# Altium PCB System Control.PcbDoc (part 6 of 7)
Units mil, origin at the board's own origin, x right, y up, seen from the top; angles counter-clockwise.
Board outline 5312.56 x 5103.22 mil, 12 copper layers (Top, GND 2, Signal 3, Signal 4, 3.3V 5, Signal 6, Signal 7, 2.5V 8, Signal 9, Signal 10, GND 11, Bottom); 503 components, 484 nets, 2219 pads, 1158 vias.
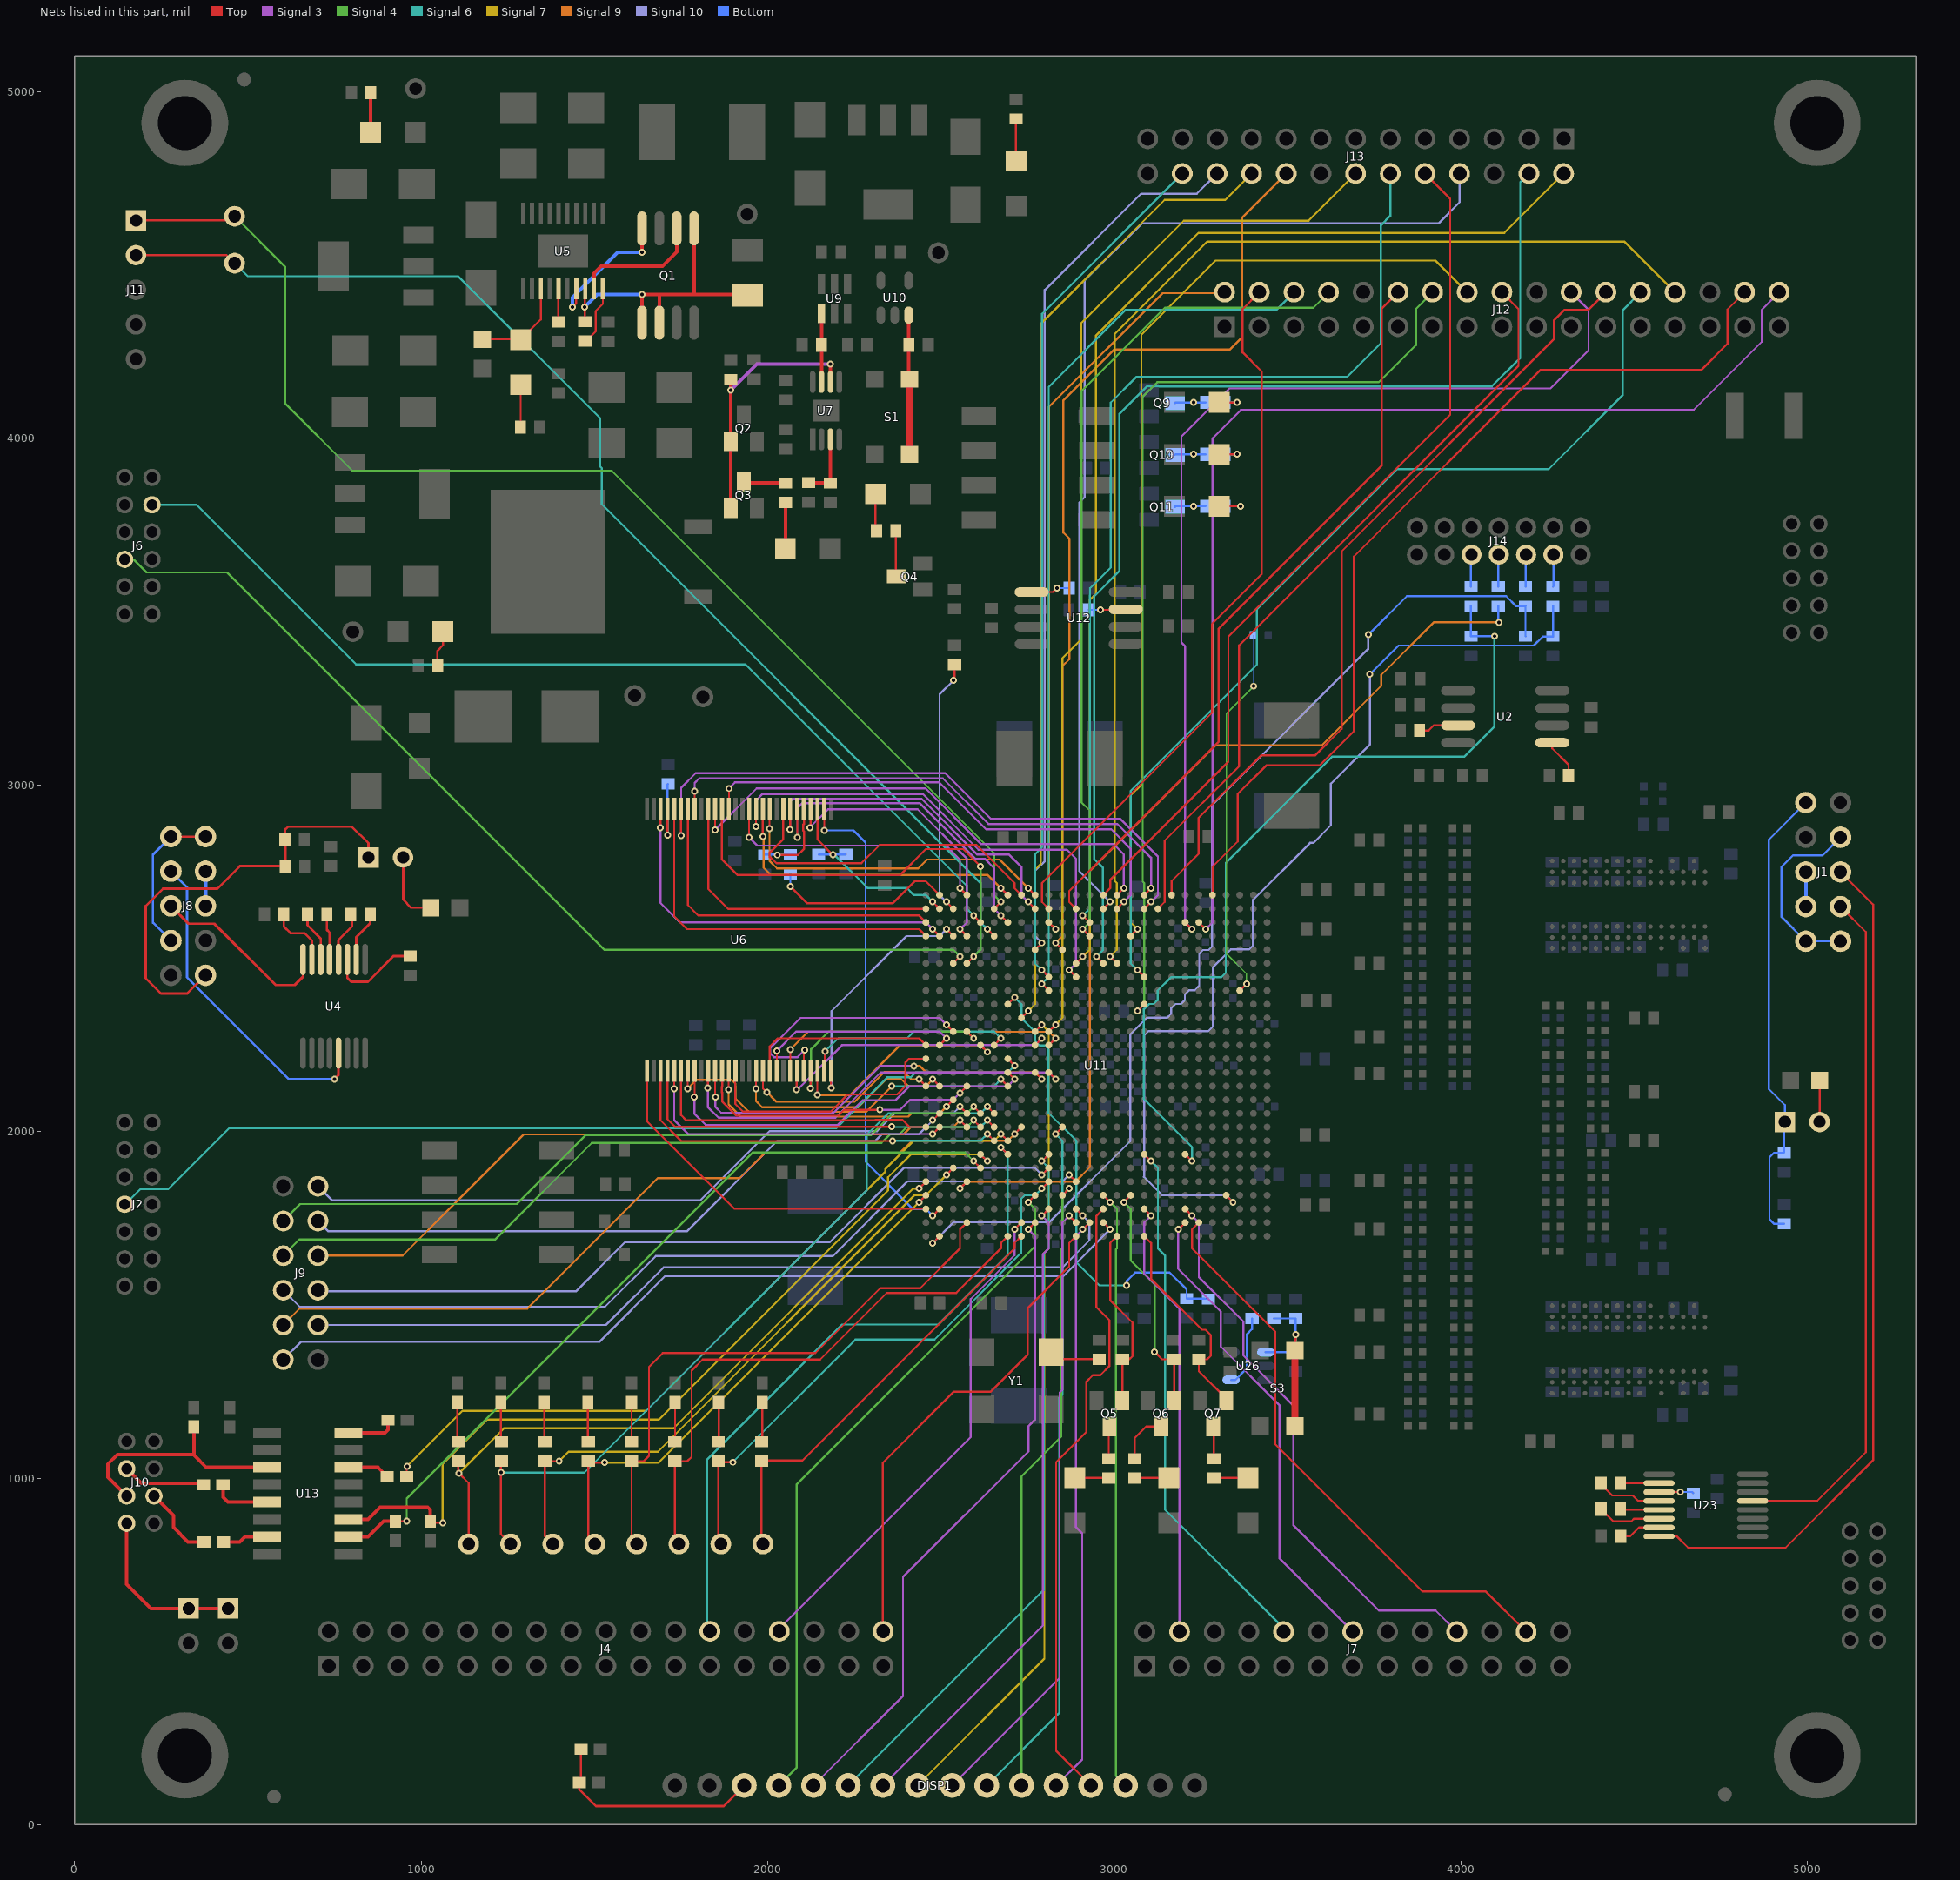
[diagram p16: the nets of this part, all layers, seen from the top]

## Via types
v1: diameter 20, hole 10, Top to Bottom, tented top, 1040 vias
v2: diameter 20, hole 8, Top to Bottom, tented top, 118 vias

## Nets (pads, with @x,y where several pads share a name; then routed paths per layer and width w, separated by ;. In a path a pad name is that pad's centre, name@x,y a point inside that pad or via, vN(x,y) a via of type N, cw(c..) or ccw(c..) an arc to the next point about the centre after c; other vN are vias at no path point) (continued)
INA2_5: J4.24 U11.G20 | length 1958.8
  Top w5.91: v1(2672.78,1953.94) U11.G20@2692.47,1934.25
  Signal 6 w5.91: J4.24@1833,558 1830,558 1825.07,562.93 1825.07,1054.07 2214.17,1443.17 2491.55,1443.17 2692.47,1644.08 2692.47,1934.25 v1(2672.78,1953.94)
INA2_6: J4.28 U11.B19 | length 1468.9
  Top w5.91: v1(2712.15,1717.71) U11.B19@2731.84,1737.4
  Signal 3 w5.91: J4.28@2033,558 2033,566 2585.14,1118.14 2585.14,1516.49 2712,1643.35 2712,1717.56 v1(2712.15,1717.71)
INA2_7: J4.34 U11.A15 | length 1433.4
  Top w5.91: J4.34@2333,558 2332,559 2332,1045 2536,1249 2642,1249 2750,1357 2750,1491 2869.63,1610.63 2869.63,1678.34 U11.A15@2889.32,1698.03
INA2_8: J7.4 U11.C10 | length 1278.3
  Top w5.91: U11.C10@3086.17,1776.77 v1(3105.86,1757.08)
  Signal 3 w5.91: v1(3105.86,1757.08) 3086.17,1737.4 3086.17,1589.83 3188,1488 J7.4@3188,557
INA2_9: J7.10 U11.G10 | length 1543.7
  Top w5.91: U11.G10@3086.17,1934.25 v1(3105.86,1914.56)
  Signal 6 w5.91: v1(3105.86,1914.56) 3125.54,1894.88 3125.54,1663.19 3146,1642.73 3146,909 3488,567 J7.10@3488,557
INA2_10: J7.14 U11.B7 | length 1397.6
  Top w5.91: v1(3184.59,1717.71) U11.B7@3204.28,1737.4
  Signal 3 w5.91: v1(3184.59,1717.71) 3184,1717.12 3184,1604 3307,1481 3307,1380 3476,1211 3476,769 J7.14@3688,557
INA2_11: J7.20 U11.C7 | length 1640.5
  Top w5.91: U11.C7@3204.28,1776.77 v1(3223.97,1757.08)
  Signal 3 w5.91: v1(3223.97,1757.08) 3243.65,1737.4 3243.65,1580.35 3372,1452 3372,1354 3516,1210 3516,865 3763,618 3927,618 J7.20@3988,557
INA2_12: J7.24 U11.B6 | length 1695.1
  Top w5.91: U11.B6@3243.65,1737.4 3223.96,1717.71 3223.96,1663.19 3464.56,1422.6 3464.56,1097.44 3889,673 4072,673 J7.24@4188,557
INB1_1: J12.2 U11.AD17 | length 2187.1
  Top w5.91: U11.AD17@2810.58,2603.54 v1(2830.27,2583.86)
  Signal 9 w5.91: v1(2830.27,2583.86) 2811,2603.12 2811,4091 3139,4419 3315,4419 J12.2@3318,4422
INB1_2: J12.6 U11.W17 | length 2578.5
  Top w5.91: v1(2790.89,2426.38) U11.W17@2810.58,2406.69
  Signal 6 w5.91: v1(2790.89,2426.38) 2810.58,2446.06 2810.58,4148.58 3033,4371 3468,4371 J12.6@3518,4421
INB1_3: J12.12 U11.AE15 | length 2179.1
  Top w5.91: U11.AE15@2889.32,2642.91 2869.63,2662.6 2869.63,2693.63 3301,3125 3301,3451 3771,3921 3771,4374 J12.12@3818,4421
INB1_4: J12.16 U11.AC11 | length 2830.6
  Top w5.91: U11.AC11@3046.8,2564.17 v1(3066.49,2583.86)
  Signal 7 w5.91: v1(3066.49,2583.86) 3047,2603.34 3047,2970 3078,3001 3078,4299 3292,4513 3926,4513 J12.16@4018,4421
INB1_5: J12.22 U11.AD7 | length 2927.3
  Top w5.91: U11.AD7@3204.28,2603.54 v1(3223.97,2583.86)
  Signal 3 w5.91: v1(3223.97,2583.86) 3204.28,2603.54 3204.28,3399.99 3193.49,3410.77 3193.49,4005.49 3332,4144 4258,4144 4368,4254 4368,4371 J12.22@4318,4421
INB1_6: J12.26 U11.Y10 | length 2856.5
  Top w5.91: v1(3066.48,2465.75) U11.Y10@3086.17,2446.06
  Signal 6 w5.91: v1(3066.48,2465.75) 3047,2485.23 3047,2983 3411,3347 3411,3506 3816,3911 4253,3911 4467,4125 4467,4370 J12.26@4518,4421
INB1_7: J12.32 U11.AF5 | length 2736.5
  Top w5.91: U11.AF5@3283.02,2682.28 3283.02,2764.02 3356,2837 3356,2974 3439,3057 3593,3057 3691,3155 3691,3659 4229,4197 4693,4197 4769,4273 4769,4372 J12.32@4818,4421
INB1_8: J13.2 U11.AA15 | length 3377.9
  Top w5.91: U11.AA15@2889.32,2485.43 v1(2909.01,2505.12)
  Signal 7 w5.91: v1(2909.01,2505.12) 2929,2525.11 2929,3534 2947,3552 2947,4297 3243,4593 4125,4593 J13.2@4296,4764
INB1_9: J13.8 U11.AE13 | length 3121.8
  Top w5.91: U11.AE13@2968.06,2642.91 v1(2987.75,2662.6)
  Signal 10 w5.91: v1(2987.75,2662.6) 2899,2751.34 2899,3815 2914,3830 2914,4455 3079,4620 3935,4620 3996,4681 J13.8@3996,4764
INB1_10: J13.12 U11.AD14 | length 2892.2
  Top w5.91: v1(2909,2623.23) U11.AD14@2928.69,2603.54
  Signal 6 w5.91: v1(2909,2623.23) 2929,2643.23 2929,3567 2989.19,3627.19 2989.19,4103.19 3063,4177 3671,4177 3769,4275 3769,4615 3796,4642 J13.12@3796,4764
INB1_11: J13.18 U11.AB16 | length 2732.8
  Top w5.91: v1(2830.26,2544.49) U11.AB16@2849.95,2524.8
  Signal 9 w5.91: v1(2830.26,2544.49) 2850,2564.23 2850,3343 2870,3363 2870,3711 2853,3728 2853,4110 2999,4256 3333,4256 3369,4292 3369,4637 J13.18@3496,4764
INB1_12: J13.22 U11.AB18 | length 2567.2
  Top w5.91: U11.AB18@2771.21,2524.8 v1(2790.9,2544.49)
  Signal 10 w5.91: v1(2790.9,2544.49) 2771.21,2564.17 2771.21,2752.21 2799,2780 2799,4428 3077,4706 3238,4706 J13.22@3296,4764
INB2_1: J12.4 U11.AE17 | length 2091.6
  Top w5.91: U11.AE17@2810.58,2642.91 2790.89,2662.6 2790.89,2717.12 3282,3208.23 3282,3465 3425,3608 3425,4193 3370,4248 3370,4373 J12.4@3418,4421
INB2_2: J12.8 U11.AC14 | length 2429.3
  Top w5.91: v1(2909,2583.86) U11.AC14@2928.69,2564.17
  Signal 4 w5.91: v1(2909,2583.86) 2929,2603.86 2929,2926 2905,2950 2905,4136 3146,4377 3574,4377 J12.8@3618,4421
INB2_3: J12.14 U11.V10 | length 2831.9
  Top w5.91: v1(3066.48,2347.64) U11.V10@3086.17,2367.32
  Signal 4 w5.91: v1(3066.48,2347.64) 3086.17,2367.32 3086.17,2717.12 3081.79,2721.5 3081.79,4119.79 3124,4162 3763,4162 3870,4269 3870,4373 J12.14@3918,4421
INB2_4: J12.18 U11.AE9 | length 2228.9
  Top w5.91: U11.AE9@3125.54,2642.91 3145.03,2662.4 3145.03,2839.24 3360,3054.21 3360,3403 4166,4209 4166,4373 J12.18@4118,4421
INB2_5: J12.24 U11.AF8 | length 2389.6
  Top w5.91: U11.AF8@3164.91,2682.28 3164.91,2722.91 3243,2801 3243,2905 3423,3085 3579,3085 3656,3162 3656,3674 4268,4286 4268,4340 4299,4371 4368,4371 J12.24@4418,4421
INB2_6: J12.28 U11.AA12 | length 3623
  Top w5.91: v1(2987.74,2505.12) U11.AA12@3007.43,2485.43
  Signal 7 w5.91: v1(2987.74,2505.12) 3007,2524.38 3007,2717 3000.58,2723.42 3000.58,4300.58 3268,4568 4471,4568 J12.28@4618,4421
INB2_7: J12.34 U11.AD6 | length 3315.4
  Top w5.91: U11.AD6@3243.65,2603.54 v1(3263.34,2583.86)
  Signal 3 w5.91: v1(3263.34,2583.86) 3283.02,2603.54 3283.02,4000.02 3365,4082 4671,4082 4868,4279 4868,4371 J12.34@4918,4421
INB2_8: J13.4 U11.AA13 | length 3407.4
  Top w5.91: v1(2948.37,2505.12) U11.AA13@2968.06,2485.43
  Signal 6 w5.91: v1(2948.37,2505.12) 2967.04,2523.78 2967.04,2760.96 2941.52,2786.48 2941.52,3544.35 3014,3616.82 3014,4069.8 3094.2,4150 4089,4150 4171,4232 4171,4739 J13.4@4196,4764
INB2_9: J13.10 U11.AF13 | length 2526.6
  Top w5.91: U11.AF13@2968.06,2682.28 2987.75,2701.97 2987.75,2725.75 3329,3067 3329,3428 3969,4068 3969,4691 J13.10@3896,4764
INB2_10: J13.14 U11.T17 | length 3053.1
  Top w5.91: U11.T17@2810.58,2288.58 v1(2830.27,2308.27)
  Signal 7 w5.91: v1(2830.27,2308.27) 2849.95,2327.95 2849.95,3365.56 2904.04,3419.65 2904.04,4332.04 3200,4628 3560,4628 J13.14@3696,4764
INB2_11: J13.20 U11.U19 | length 2813.7
  Top w5.91: U11.U19@2731.84,2327.95 v1(2751.53,2347.64)
  Signal 7 w5.91: v1(2751.53,2347.64) 2771.21,2367.32 2771.21,2755.21 2787,2771 2787,4330 3145,4688 3320,4688 J13.20@3396,4764
INB2_12: J13.24 U11.Y17 | length 2510.2
  Top w5.91: v1(2790.89,2465.75) U11.Y17@2810.58,2446.06
  Signal 6 w5.91: v1(2790.89,2465.75) 2771.21,2485.43 2771.21,2800.21 2791,2820 2791,4359 J13.24@3196,4764
IO1: J9.2 U11.B13 | length 2569.2
  Top w5.91: U11.B13@2968.06,1737.4 v1(2987.74,1717.71)
  Signal 10 w5.91: J9.2@602,1342 653,1393 1514,1393 1704,1583 2853.03,1583 v1(2987.74,1717.71)
IO2: J9.3 U11.C15 | length 2433.9
  Top w5.91: U11.C15@2889.32,1776.77 v1(2909,1757.08)
  Signal 10 w5.91: J9.3@702,1442 1533,1442 1699,1608 2850,1608 2928,1686 2928,1738.09 v1(2909,1757.08)
IO3: J9.4 U11.J19 | length 2366.4
  Top w5.91: v1(2712.15,1993.3) U11.J19@2731.84,2012.99
  Signal 9 w5.91: J9.4@602,1442 649,1489 1306,1489 1682.66,1865.66 1918.66,1865.66 1991,1938 2380,1938 2415.62,1973.62 2692.47,1973.62 v1(2712.15,1993.3)
IO4: J9.5 U11.F17 | length 2273.6
  Top w5.91: v1(2790.89,1875.19) U11.F17@2810.58,1894.88
  Signal 10 w5.91: J9.5@702,1542 705,1539 1446,1539 1588,1681 2179,1681 2393,1895 2771.09,1895 v1(2790.89,1875.19)
IO5: J9.6 U11.E15 | length 2473.3
  Top w5.91: v1(2869.63,1875.2) U11.E15@2889.32,1855.51
  Signal 10 w5.91: J9.6@602,1542 650,1494 1530,1494 1677,1641 2188,1641 2403,1856 2850,1856 2869.2,1875.2 v1(2869.63,1875.2)
IO6: J9.7 U11.J23 | length 2042.3
  Top w5.91: v1(2554.67,2032.68) U11.J23@2574.36,2012.99
  Signal 9 w5.91: J9.7@702,1642 946,1642 1091,1787 1295.66,1991.66 2391.66,1991.66 2413,2013 2535,2013 v1(2554.67,2032.68)
IO7: J9.8 U11.J22 | length 2181.7
  Top w5.91: v1(2594.04,2032.68) U11.J22@2613.73,2012.99
  Signal 4 w5.91: J9.8@602,1642 649,1689 1214,1689 1492,1967 2327.61,1967 2352.27,1991.66 2379.66,1991.66 2400.99,2012.99 2574.36,2012.99 v1(2594.04,2032.68)
IO8: J9.9 U11.K25 | length 1947
  Top w5.91: v1(2475.93,2032.67) U11.K25@2495.62,2052.36
  Signal 10 w5.91: J9.9@702,1742 732,1712 1766,1712 2027,1973 2310,1973 2329,1992 2435.26,1992 v1(2475.93,2032.67)
IO9: J9.10 U11.K22 | length 2156.6
  Top w5.91: v1(2594.04,2072.05) U11.K22@2613.73,2052.36
  Signal 4 w5.91: J9.10@602,1742 651,1791 1276,1791 1474,1989 2297,1989 2360.36,2052.36 2574.36,2052.36 v1(2594.04,2072.05)
IO10: J9.11 U11.K23 | length 2008.9
  Top w5.91: v1(2554.67,2072.05) U11.K23@2574.36,2052.36
  Signal 10 w5.91: J9.11@702,1842 742,1802 1806,1802 2005,2001 2315,2001 2366.36,2052.36 2534.99,2052.36 v1(2554.67,2072.05)
IO/RXD: J10.6 R73.1 U13.3 | length 681.5
  Top w10: J10.6@150.26,948.52 96,1002.78 96,1041 123,1068 343,1068 344,1067 ; R73.1@344,1148 344,1067 ; U13.3@555,1031 380,1031 344,1067
IO/RXD_FPGA: R98.1 U11.H20 | length 2173.6
  Top w5.91: R98.1@958,1004 958,1033 v1(959,1034) ; v1(2672.78,1993.31) U11.H20@2692.47,1973.62
  Signal 7 w5.91: v1(959,1034) 1119,1194 1648.88,1194 2339,1884.12 2339,1891.22 2421.41,1973.62 2653.1,1973.62 v1(2672.78,1993.31)
IO/TXD: J10.5 R116.2 | length 220.1
  Top w10: J10.5@229,948.52 285,892.52 285,858 327,816 R116.2@374,816
IO/TXD_FPGA: R100.1 U11.F22 U13.10 | length 2340.1
  Top w5.91: R100.1@925.7,876.31 926,876 v1(958,876) ; v1(2594.04,1914.57) U11.F22@2613.73,1894.88
  Top w10: U13.10@790,831 846,831 891.31,876.31 R100.1@925.7,876.31
  Signal 4 w5.91: v1(958,876) 958,941 1957,1940 2568.61,1940 v1(2594.04,1914.57)
JTAG_TCK: R166.1 R167.1 U11.A25 | length 3126.4
  Top w5.91: v1(2475.93,1678.34) U11.A25@2495.62,1698.03
  Signal 10 w5.91: v1(2475.93,1678.34) 2535.59,1738 2812,1738 3046,1972 3046,2280 3094.98,2328.98 3152.96,2328.98 3163.89,2339.91 3163.89,2355.89 3176.35,2368.35 3192.33,2368.35 3203.26,2379.28 3203.26,2395.26 3215.72,2407.72 3231.7,2407.72 3244.67,2420.7 3244.67,2512.85 3255.61,2523.78 3271.78,2523.78 3282,2534 3282,2942 3732,3392 3732,3433 v1(3733,3434)
  Bottom w5.91: v1(3733,3434) 3843.86,3544.86 4130.14,3544.86 4159.8,3515.2 R166.1@4185.9,3515.2 ; R167.1@4186.39,3429.07 4185.9,3429.55 4185.9,3469.33 R166.1@4185.9,3515.2 ; R166.1@4186.39,3515.68 R166.1@4185.9,3515.2
JTAG_TDI: R157.1 R158.1 U11.G7 | length 2490.9
  Top w5.91: U11.G7@3204.28,1934.25 v1(3223.97,1914.56)
  Signal 7 w5.91: v1@4095.82,3428.53 v1(4096.6,3429.31)
  Signal 6 w5.91: v1(3223.97,1914.56) 3223.97,1955.03 3085.15,2093.85 3085.15,2353.32 3100.17,2368.35 3113.58,2368.35 3124.52,2379.28 3124.52,2406.52 3163.04,2445.04 3308.39,2445.04 3321.37,2458.02 3321.37,2774.58 3628.79,3082 4010,3082 4096.6,3168.6 v1(4096.6,3429.31)
  Bottom w5.91: R157.1@4028.91,3515.68 R158.1@4028.91,3429.07 4029.15,3429.31 v1(4096.6,3429.31)
JTAG_TDO: R160.1 U11.E23 | length 2825.5
  Top w5.91: v1(2554.67,1835.82) U11.E23@2574.36,1855.51
  Signal 9 w5.91: v1(2554.67,1835.82) 2573.85,1855 2887,1855 2929,1897 2929,2751 3292,3114 3598,3114 3770,3286 3770,3317.82 3921.34,3469.16 v1(4109.59,3469.16)
  Bottom w5.91: R160.1@4107.65,3515.68 4107.65,3471.1 v1(4109.59,3469.16)
JTAG_TMS: R171.1 R172.1 U11.D4 | length 3181.5
  Top w5.91: U11.D4@3322.39,1816.14 v1(3342.08,1796.45)
  Signal 10 w5.91: v1(3342.08,1796.45) 3321.53,1817 3137.66,1817 3085,1869.66 3086,1870.66 3086,2277 3098.61,2289.61 3271.07,2289.61 3283.85,2302.39 3283.85,2473.56 3336.11,2525.82 3389.17,2525.82 3400.11,2536.76 3400.11,2668.56 3564.46,2832.91 3574.21,2832.91 3624.51,2883.21 3624.51,3003.51 3737,3116 v1(3737,3319)
  Bottom w5.91: v1(3737,3319) 3820.24,3402.24 4210.24,3402.24 4236.18,3428.18 4266.43,3428.18 R172.1@4265.54,3429.07 ; R172.1@4265.54,3429.07 R171.1@4265.54,3515.68 ; R172.1@4265.54,3429.07 R171.1@4265.54,3515.68 ; R172.1@4265.54,3429.07 R171.1@4265.54,3515.68 ; R172.1@4265.54,3429.07 R171.1@4265.54,3515.68 ; R172.1@4265.54,3429.07 R171.1@4265.54,3515.68
LCD_D1: DISP1.7 U11.C17 | length 1878
  Top w5.91: v1(2790.89,1757.08) U11.C17@2810.58,1776.77
  Signal 3 w5.91: DISP1.7@2332.01,113.33 2794,575.33 2794,1646.61 2810.58,1663.19 2810.58,1737.4 v1(2790.89,1757.08)
LCD_D2: DISP1.8 U11.T18 | length 2387.7
  Top w5.91: U11.T18@2771.21,2288.58 v1(2790.9,2308.27)
  Signal 7 w5.91: DISP1.8@2432.01,113.33 2798,479.33 2798,1650.61 2810.58,1663.19 2810.58,2288.58 v1(2790.9,2308.27)
LCD_D3: DISP1.9 U11.B15 | length 1811.4
  Top w5.91: v1(2869.63,1757.09) U11.B15@2889.32,1737.4
  Signal 3 w5.91: DISP1.9@2532.01,113.33 2842,423.33 2842,1247 2849.95,1254.95 2849.95,1737.4 v1(2869.63,1757.09)
LCD_D4: DISP1.10 U11.J16 | length 2006.2
  Top w5.91: v1(2830.26,1993.3) U11.J16@2849.95,2012.99
  Signal 6 w5.91: DISP1.10@2632.01,113.33 2841,322.33 2841,1231 2849.95,1239.95 2849.95,1973.62 v1(2830.26,1993.3)
LCD_D5: DISP1.11 U11.D16 | length 1807.3
  Top w5.91: U11.D16@2849.95,1816.14 v1(2869.64,1835.83)
  Signal 4 w5.91: DISP1.11@2732.01,113.33 2732.01,1005.01 2847.04,1120.04 2847.04,1660.28 2849.95,1663.19 2849.95,1816.14 v1(2869.64,1835.83)
LCD_D6: DISP1.12 U11.B14 | length 1678.8
  Top w5.91: v1(2909,1717.71) U11.B14@2928.69,1737.4
  Signal 3 w5.91: DISP1.12@2832.01,113.33 2907,188.33 2907,841 2889.32,858.68 2889.32,1698.03 v1(2909,1717.71)
LCD_D7: DISP1.13 U11.C13 | length 1804.7
  Top w5.91: DISP1.13@2932.01,113.33 2832,213.34 2832,1046 2918.53,1132.53 2918.53,1277.53 2938,1297 2959.07,1297 2986,1323.93 2986,1455 2948.37,1492.63 2948.37,1757.08 U11.C13@2968.06,1776.77
LCD_D8: DISP1.14 U11.D13 | length 1731.7
  Top w5.91: U11.D13@2968.06,1816.14 v1(2987.75,1796.45)
  Signal 4 w5.91: v1(2987.75,1796.45) 3007.43,1776.77 3007.43,1663.19 3004.52,1660.27 3004.52,140.83 DISP1.14@3032.01,113.33
LCD_EN: DISP1.6 U11.G17 | length 2076.9
  Top w5.91: v1(2790.89,1914.56) U11.G17@2810.58,1934.25
  Signal 6 w5.91: DISP1.6@2232.01,113.33 2796,677.33 2796,1648.61 2810.58,1663.19 2810.58,1894.88 v1(2790.89,1914.56)
LCD_R/~W: DISP1.5 U11.B18 | length 1905.1
  Top w5.91: v1(2751.52,1717.71) U11.B18@2771.21,1737.4
  Signal 3 w5.91: DISP1.5@2132.01,113.33 2390,371.33 2390,715 2752.55,1077.55 2752.55,1150.64 2771.21,1169.31 2771.21,1698.03 v1(2751.52,1717.71)
LCD_RS: DISP1.4 U11.D18 | length 2025.3
  Top w5.91: v1(2751.52,1796.45) U11.D18@2771.21,1816.14
  Signal 4 w5.91: DISP1.4@2032.01,113.33 2083,164.33 2083,981.1 2771.21,1669.31 2771.21,1776.77 v1(2751.52,1796.45)
LED0: Q7.1 R40.2 U11.A10 | length 620.4
  Top w5.91: U11.A10@3086.17,1698.03 3105.86,1678.34 3105.86,1575.14 3242.95,1438.05 3252.93,1428.07 3263.04,1428.07 3277.87,1413.24 3277.87,1353.26 3267.43,1342.82 R40.2@3243.65,1342.82 3243.65,1308.27 3322.39,1229.53 Q7.1@3322.39,1223.72
LED1: Q6.1 R41.2 U11.D11 | length 681.4
  Top w5.91: v1(3027.11,1796.45) U11.D11@3046.8,1816.14 ; v1@3116.39,1363.89 3137.47,1342.82 R41.2@3172.78,1342.82 Q6.1@3172.78,1223.72
  Signal 4 w5.91: v1(3027.11,1796.45) 3046.8,1776.77 3046.8,1628.2 3116,1559 v1(3116,1364)
LED2: Q5.1 R37.2 U11.A12 | length 532.6
  Top w5.91: U11.A12@3007.43,1698.03 2987.74,1678.34 2987.74,1513.26 3052,1449 3052,1352 3042.82,1342.82 R37.2@3023.18,1342.82 Q5.1@3023.18,1223.72
LED3: LD0.1 TP9.1 U11.A19 | length 1268.4
  Top w5.91: TP9.1@1986,810 1982,814 LD0.1@1982,1049 1984,1051 2100.22,1051 2712.15,1662.93 2712.15,1678.34 U11.A19@2731.84,1698.03
LED4: LD1.1 TP10.1 U11.E17 | length 1623.7
  Top w5.91: TP10.1@1864.71,810 1857,817.71 LD1.1@1857,1049 1860,1046 v1(1899,1046) ; v1(2790.89,1835.82) U11.E17@2810.58,1855.51
  Signal 6 w5.91: v1(1899,1046) 2253,1400 2481,1400 2731,1650 2731,1806 2741,1816 2771.07,1816 v1(2790.89,1835.82)
LED5: LD2.1 TP11.1 U11.A20 | length 1627.8
  Top w5.91: TP11.1@1743.43,810 1732,821.43 LD2.1@1732,1049 1768,1049 1780,1061 1780,1310 1812,1342 2151,1342 2343,1534 2543.59,1534 2672.78,1663.19 2672.78,1678.34 U11.A20@2692.47,1698.03
LED6: LD3.1 TP12.1 U11.B23 | length 1680.3
  Top w5.91: TP12.1@1622.14,810 1607,825.14 LD3.1@1607,1049 1642,1049 1657,1064 1657,1321 1697,1361 2137,1361 2324,1548 2439.48,1548 2554.67,1663.19 2554.67,1717.71 U11.B23@2574.36,1737.4
LED7: LD4.1 TP13.1 U11.D26 | length 1542.1
  Top w5.91: TP13.1@1500.86,810 1482,828.86 LD4.1@1482,1049 1486,1045 v1(1529,1045) ; v1(2436.56,1796.45) U11.D26@2456.25,1816.14
  Signal 7 w5.91: v1(1529,1045) 1685.11,1045 v1(2436.56,1796.45)
LED8: LD5.1 TP14.1 U11.F24 | length 1776.7
  Top w5.91: TP14.1@1379.57,810 1357,832.57 LD5.1@1357,1049 v1(1398,1049) ; v1(2515.3,1875.19) U11.F24@2534.99,1894.88
  Signal 7 w5.91: v1(1398,1049) 1425,1076 1683,1076 2424,1817 2457.11,1817 v1(2515.3,1875.19)
LED9: LD6.1 TP15.1 U11.K21 | length 2213.9
  Top w5.91: LD6.1@1232,1049 1230,1047 v1(1230,1016) 1230,838.29 TP15.1@1258.29,810 ; v1(2633.41,2072.05) U11.K21@2653.1,2052.36
  Signal 6 w5.91: v1(1230,1016) 1470.88,1016 2286,1831.12 2286,1991 2347.36,2052.36 2613.73,2052.36 v1(2633.41,2072.05)
LED10: LD7.1 TP16.1 U11.E26 | length 1947.2
  Top w5.91: LD7.1@1107,1049 1107,1016 v1(1109,1014) 1137,986 TP16.1@1137,810 ; v1(2436.56,1835.82) U11.E26@2456.25,1855.51
  Signal 7 w5.91: v1(1109,1014) 1239,1144 1728,1144 2419.82,1835.82 v1(2436.56,1835.82)
LED_ENABLE: J2.8 U11.P20 | length 2761.3
  Top w5.91: U11.P20@2692.47,2209.84 v1(2712.16,2190.16)
  Signal 6 w5.91: J2.8@144.36,1790.12 146.12,1790.12 190.21,1834.21 270.21,1834.21 446,2010 2198,2010 2344.57,2156.57 2412.57,2156.57 2426.34,2170.34 2692.34,2170.34 v1(2712.16,2190.16)
LID_EN: J6.8 U11.AA24 | length 2912.7
  Top w5.91: U11.AA24@2534.99,2485.43 v1(2554.67,2505.12)
  Signal 4 w5.91: J6.8@144.36,3650.86 169.65,3650.86 207.44,3613.07 439.93,3613.07 1528.2,2524.8 2534.99,2524.8 v1(2554.67,2505.12)
LIDPWMA: J11.2 TP2.1 U11.AC21 | length 3498.9
  Top w5.91: J11.2@177.15,4528.7 438.57,4528.7 TP2.1@461.56,4505.71 ; v1(2633.41,2583.86) U11.AC21@2653.1,2564.17
  Signal 6 w5.91: TP2.1@461.56,4505.71 499.27,4468 1106.37,4468 1516.33,4058.05 1516.33,3918.65 1521,3913.97 1521,3809.85 2613.73,2717.12 2613.73,2603.54 v1(2633.41,2583.86)
LIDPWMB: J11.1 TP1.1 U11.AE21 | length 3649.4
  Top w5.91: J11.1@177.15,4628.7 449.54,4628.7 TP1.1@461.56,4640.71 ; U11.AE21@2653.1,2642.91 v1(2672.79,2662.6)
  Signal 4 w5.91: TP1.1@461.56,4640.71 608,4494.27 608,4100 802,3906 1550,3906 2653.1,2802.9 2653.1,2682.28 v1(2672.79,2662.6)
MISC_IN: J10.4 R101.2 | length 240.9
  Top w10: J10.4@150.26,1027.26 192.31,985.21 367.79,985.21 R101.2@372,981
MISC_IN_FPGA: R99.1 U11.G22 U13.11 | length 2493.9
  Top w5.91: R99.1@1026,876 1031,871 v1(1062,871) ; U11.G22@2613.73,1934.25 v1(2633.41,1914.56)
  Top w10: U13.11@790,881 847,881 882,916 1019,916 1026,909 R99.1@1026,876
  Signal 7 w5.91: v1(1062,871) 1062,1041 1190,1169 1685.89,1169 2347,1830.11 2347,1868 2413,1934 2613.98,1934 v1(2633.41,1914.56)
NetC6_1: C6.1 U4.3 | length 269.7
  Top w7: U4.3@786.94,2496.44 786.94,2443.06 798,2432 846,2432 920,2506 C6.1@968,2506
NetC10_1: C10.1 U4.2 | length 146.2
  Top w7: U4.2@812.54,2496.44 812.54,2560.77 852.74,2600.97 C10.1@852.74,2625.97
NetC10_2: C10.2 U4.4 | length 147.3
  Top w7: U4.4@761.34,2496.44 761.34,2552.88 800.46,2592 800.46,2622.26 C10.2@796.74,2625.97
NetC13_2: C13.2 U4.7 | length 186.7
  Top w7: C13.2@603.74,2625.97 603.74,2591.86 623.29,2572.31 663.69,2572.31 684.54,2551.46 U4.7@684.54,2496.44
NetC14_1: C14.1 U4.5 | length 132.9
  Top w7: C14.1@727.74,2625.97 727.74,2582.03 735.74,2574.03 U4.5@735.74,2496.44
NetC14_2: C14.2 U4.6 | length 145.4
  Top w7: C14.2@671.74,2625.97 671.74,2595.26 710.14,2556.86 U4.6@710.14,2496.44
NetC16_2: C16.2 J8.10 R9.1 W2.1 | length 1282.9
  Top w7: J8.10@377.74,2450.97 324.77,2398 249,2398 204.88,2442.12 204.88,2651 254.88,2701 412.03,2701 477,2765.97 R9.1@607.74,2765.97 607.74,2839.97 C16.2@606.74,2840.97 606.74,2870.72 615.42,2879.4 800.46,2879.4 847.74,2832.11 W2.1@847.74,2790.97
NetC21_1: C21.1 U5.20 | length 175.5
  Top w5.91: C21.1@1472,4280.71 1475.93,4280.71 1503.49,4308.27 1503.49,4367.32 1524.16,4387.99 U5.20@1524.16,4432.28
NetC21_2: C21.2 L1.1 Q1.1 Q1.5 Q1.6 U5.18 | length 937
  Top w5.91: C21.2@1472,4336.71 v1(1472,4379.13) U5.18@1472,4431.3 ; U5.18@1472.98,4432.28 U5.18@1472.98,4431.3 ; U5.18@1472,4431.3 U5.18@1472.98,4431.3 ; U5.18@1472,4431.3 U5.18@1472.98,4431.3 ; U5.18@1472,4431.3 U5.18@1472.98,4431.3 ; U5.18@1472,4431.3 U5.18@1472.98,4431.3 ; U5.18@1472,4431.3 U5.18@1472.98,4431.3
  Top w10: Q1.5@1637.15,4333.86 1637.15,4414.37 v1(1637.35,4414.57) 1687.15,4414.57 ; Q1.6@1687.15,4333.86 1687.15,4414.57 ; Q1.1@1787.15,4605.51 1787.15,4414.57 ; L1.1@1940.5,4412.56 1938.49,4414.57 1787.15,4414.57 ; 1687.15,4414.57 1787.15,4414.57
  Bottom w10: v1(1472,4379.13) 1507.43,4414.57 v1(1637.35,4414.57)
NetC79_1: C79.1 U23.2 | length 540.7
  Top w5.91: C79.1@4460.19,985.43 4464.12,985.43 C79.1@4464.24,985.55 ; C79.1@4464.24,985.55 U23.2@4571.56,985.55 ; C79.1@4464.24,985.55 U23.2@4571.56,985.55 ; C79.1@4464.24,985.55 U23.2@4571.56,985.55 ; C79.1@4464.24,985.55 U23.2@4571.56,985.55 ; C79.1@4464.24,985.55 U23.2@4571.56,985.55
NetC79_2: C79.2 U23.4 | length 443.7
  Top w5.91: C79.2@4404.2,982.36 C79.2@4404.19,985.43 ; C79.2@4404.2,982.36 C79.2@4404.19,985.43 ; C79.2@4404.2,982.36 C79.2@4404.19,985.43 ; C79.2@4404.2,982.36 C79.2@4404.19,985.43 ; C79.2@4404.2,982.36 C79.2@4404.19,985.43 ; C79.2@4404.2,982.36 4436.56,950 4495.62,950 4511.29,934.33 ; 4511.29,934.33 U23.4@4571.56,934.34 ; 4511.29,934.33 U23.4@4571.56,934.34 ; 4511.29,934.33 U23.4@4571.56,934.34 ; 4511.29,934.33 U23.4@4571.56,934.34 ; 4511.29,934.33 U23.4@4571.56,934.34
NetC80_2: C80.2 U23.7 | length 353.7
  Top w5.91: C80.2@4461.07,831.89 4487.74,831.89 4513.41,857.56 ; 4513.41,857.56 U23.7@4571.56,857.56 ; 4513.41,857.56 U23.7@4571.56,857.56 ; 4513.41,857.56 U23.7@4571.56,857.56 ; 4513.41,857.56 U23.7@4571.56,857.56 ; 4513.41,857.56 U23.7@4571.56,857.56
NetC81_1: C81.1 U23.5 | length 112.2
  Top w5.91: C81.1@4460.19,910.63 4462.08,908.74 U23.5@4571.56,908.74
NetC81_2: C81.2 U23.6 | length 185.8
  Top w5.91: C81.2@4404.19,910.63 4438.93,875.91 4438.93,875.2 4491.68,875.2 4499.63,883.15 U23.6@4571.56,883.15
NetC183_1: C183.1 R182.2 R183.2 S3.2 S3.2_1 U26.1 | length 773
  Top w5.91: S3.2_1@3520.34,1367.32 S3.2_1@3520.82,1367.79 ; v1(3523.18,1414.57) S3.2_1@3523.18,1367.8 ; S3.2_1@3520.82,1367.79 S3.2_1@3523.18,1367.8 ; S3.2_1@3520.82,1367.79 S3.2_1@3523.18,1367.8 ; S3.2_1@3520.82,1367.79 S3.2_1@3523.18,1367.8 ; S3.2_1@3520.82,1367.79 S3.2_1@3523.18,1367.8
  Top w20: S3.2@3520.82,1150.79 S3.2_1@3520.82,1367.79
  Bottom w5.91: U26.1@3436.56,1363.39 C183.1@3523.18,1363.39 v1(3523.18,1414.57) R183.2@3523.18,1460.93 ; R182.2@3460.19,1460.94 R183.2@3523.18,1460.94 ; R182.2@3460.19,1460.94 R183.2@3523.18,1460.94 ; R182.2@3460.19,1460.94 R183.2@3523.18,1460.94 ; R182.2@3460.19,1460.94 R183.2@3523.18,1460.94 ; R182.2@3460.19,1460.94 R183.2@3523.18,1460.94
NetC252_2: C252.2 J1.10 R294.1 W1.1 | length 1349.7
  Bottom w5.91: R294.1@4932.63,1733.46 4903.54,1733.46 4890,1747 4890,1926 4903.07,1939.07 C252.2@4932.63,1939.07 4932.63,2025.51 W1.1@4934.71,2027.6 4934.71,2076.29 4888,2123 4888,2842 J1.10@4995,2949
NetC253_1: C253.1 U23.3 | length 100.7
  Top w5.91: U23.3@4571.56,959.94 4632.94,959.94 v1(4633,960)
  Bottom w5.91: v1(4633,960) 4666.76,960 C253.1@4670.63,956.13
NetD1_2: D1.2 R2.2 | length 114.6
  Top w10: D1.2@853.81,4883.07 853.89,4883.15 853.89,4996.38 R2.2@854.75,4997.24
NetD2_2: D2.2 R3.2 | length 103.7
  Top w6: R3.2@1046.9,3344.92 1046.9,3387.11 1062.63,3402.83 D2.2@1062.63,3442.13
NetD4_1: D4.1 R1.2 U5.13 | length 718.1
  Top w5.91: U5.13@1345.03,4432.28 1345.03,4342.72 D4.1@1286.96,4284.65 D4.1@1285.62,4285.98 ; R1.2@1176.72,4285.97 D4.1@1285.62,4285.98 ; R1.2@1176.72,4285.97 D4.1@1285.62,4285.98 ; R1.2@1176.72,4285.97 D4.1@1285.62,4285.98 ; R1.2@1176.72,4285.97 D4.1@1285.62,4285.98 ; R1.2@1176.72,4285.97 D4.1@1285.62,4285.98
NetD4_2: D4.2 R4.2 | length 610.7
  Top w5.91: R4.2@1286.07,4032.68 R4.2@1286.96,4032.68 ; R4.2@1286.96,4032.68 D4.2@1286.96,4154.65 ; R4.2@1286.96,4032.68 D4.2@1286.96,4154.65 ; R4.2@1286.96,4032.68 D4.2@1286.96,4154.65 ; R4.2@1286.96,4032.68 D4.2@1286.96,4154.65 ; R4.2@1286.96,4032.68 D4.2@1286.96,4154.65
NetD5_2: D5.2 R19.2 | length 133.1
  Top w10: D5.2@2050.66,3682.28 D5.2@2050.66,3682.28 R19.2@2050.74,3815.26
NetD6_2: D6.2 R23.2 | length 534.6
  Top w5.91: D6.2@2310.5,3839.76 D6.2@2310.58,3839.76 ; R23.2@2313.63,3733.46 R23.2@2310.58,3733.46 ; R23.2@2310.58,3733.46 D6.2@2310.58,3839.76 ; R23.2@2310.58,3733.46 D6.2@2310.58,3839.76 ; R23.2@2310.58,3733.46 D6.2@2310.58,3839.76 ; R23.2@2310.58,3733.46 D6.2@2310.58,3839.76 ; R23.2@2310.58,3733.46 D6.2@2310.58,3839.76
NetD8_2: D8.2 R33.2 | length 121.1
  Top w5.91: D8.2@2716.09,4800.47 R33.2@2716.09,4921.56
NetD9_2: D9.2 R38.2 | length 98.8
  Top w5.91: D9.2@2885.38,1001.26 2885.46,1001.18 2982.94,1001.18 R38.2@2983.81,1000.3
NetD12_2: D12.2 R39.2 | length 98.8
  Top w5.91: R39.2@3058.61,1000.3 3059.48,1001.18 3156.96,1001.18 D12.2@3157.04,1001.26
NetD13_2: D13.2 R174.2 | length 85.7
  Top w5.91: D13.2@3302.78,4103.54 v1(3353.89,4103.54)
  Bottom w5.91: R174.2@3319.34,4103.54 v1(3353.89,4103.54)
NetD14_2: D14.2 R175.2 | length 85.7
  Top w5.91: D14.2@3302.78,3953.94 v1(3353.89,3953.94)
  Bottom w5.91: R175.2@3319.34,3953.94 v1(3353.89,3953.94)
NetD15_2: D15.2 R176.2 | length 105.3
  Top w5.91: D15.2@3302.78,3804.33 v1(3363.69,3804.33)
  Bottom w5.91: R176.2@3319.34,3804.33 v1(3363.69,3804.33)
NetD16_2: D16.2 R42.2 | length 493.1
  Top w5.91: R42.2@3286.96,1000.3 R42.2@3286.96,1001.18 ; D16.2@3385.38,1001.26 D16.2@3385.38,1001.18 ; R42.2@3286.96,1001.18 D16.2@3385.38,1001.18 ; R42.2@3286.96,1001.18 D16.2@3385.38,1001.18 ; R42.2@3286.96,1001.18 D16.2@3385.38,1001.18 ; R42.2@3286.96,1001.18 D16.2@3385.38,1001.18 ; R42.2@3286.96,1001.18 D16.2@3385.38,1001.18
NetDISP1_3: DISP1.3 R5.1 R7.2 | length 638.5
  Top w7: R7.2@1461,218 1461,127 R5.1@1456,122 1456,102 1504,54 1872.67,54 DISP1.3@1932.01,113.33
NetJ1_1: J1.1 J1.4 J1.6 | length 556.3
  Bottom w5.91: J1.6@4990,2544 J1.6@4995,2549 ; J1.1@5095,2549 J1.6@4995,2549 ; J1.4@5095,2849 5043,2797 4958,2797 4925,2764 4925,2619 J1.6@4995,2549
NetJ1_2: J1.2 U23.13 | length 1988.9
  Top w5.91: U23.13@4841.56,934.34 5027.34,934.34 5168,1075 5168,2576 J1.2@5095,2649
NetJ1_3: J1.3 U23.8 | length 2471.8
  Top w5.91: U23.8@4571.56,831.94 4623.06,831.94 4656,799 4936,799 5189,1052 5189,2655 J1.3@5095,2749
NetJ1_7: J1.7 J1.8 | length 100
  Bottom w10: J1.7@4995,2649 J1.8@4995,2749
NetJ8_1: J8.1 J8.4 J8.6 | length 442.9
  Top w7: J8.1@277.74,2850.97 J8.6@377.74,2850.97
  Bottom w7: J8.4@277.74,2550.97 226,2602.71 226,2799.23 J8.1@277.74,2850.97
NetJ8_2: J8.2 U4.13 | length 952.7
  Top w7: v1(749.28,2151.05) 761.34,2163.12 U4.13@761.34,2226.44
  Bottom w7: J8.2@277.74,2750.97 324.08,2704.63 324.08,2444.71 617.74,2151.05 v1(749.28,2151.05)
NetJ8_3: J8.3 U4.8 | length 535.5
  Top w7: J8.3@277.74,2650.97 328.84,2599.87 402.82,2599.87 579.99,2422.7 635.1,2422.7 658.94,2446.54 U4.8@658.94,2496.44
NetJ8_7: J8.7 J8.8 | length 100
  Bottom w10: J8.8@377.74,2650.97 J8.7@377.74,2750.97
NetJ10_8: J10.8 W3.1 W4.1 | length 497.7
  Top w10: J10.8@150.26,869.78 150.26,693.74 220,624 W4.1@443,624
NetJ14_4: J14.4 R171.2 | length 118.4
  Bottom w6: R171.2@4265.13,3571.68 4266.74,3573.3 J14.4@4266.74,3664.46 J14.4@4266.74,3689.46
NetJ14_6: J14.6 R166.2 | length 118.4
  Bottom w6: R166.2@4186.39,3571.68 4186.39,3662.85 J14.6@4188,3664.46 J14.6@4188,3689.46
NetJ14_8: J14.8 R160.2 | length 118.4
  Bottom w6: R160.2@4107.65,3571.68 4107.65,3662.85 J14.8@4109.26,3664.46 J14.8@4109.26,3689.46
NetJ14_10: J14.10 R157.2 | length 118.4
  Bottom w6: R157.2@4028.91,3571.68 4028.91,3662.85 J14.10@4030.52,3664.46 J14.10@4030.52,3689.46
NetLD0_2: LD0.2 R18.2 | length 113.8
  Top w5.91: LD0.2@1982,1105 1984,1107 R18.2@1984,1218
NetLD1_2: LD1.2 R28.2 | length 113.5
  Top w5.91: LD1.2@1857,1105 1858.29,1106.29 R28.2@1858.29,1218
NetLD2_2: LD2.2 R34.2 | length 113.2
  Top w5.91: LD2.2@1732,1105 1732.57,1105.57 R34.2@1732.57,1218
NetLD3_2: LD3.2 R36.2 | length 113.1
  Top w5.91: R36.2@1606.86,1218 1606.86,1105.14 LD3.2@1607,1105
NetLD4_2: LD4.2 R43.2 | length 113.4
  Top w5.91: R43.2@1481.14,1218 1481.14,1105.86 LD4.2@1482,1105
NetLD5_2: LD5.2 R44.2 | length 113.7
  Top w5.91: R44.2@1355.43,1218 1355.43,1106.57 LD5.2@1357,1105
NetLD6_2: LD6.2 R45.2 | length 113.9
  Top w5.91: R45.2@1229.71,1218 1229.71,1107.29 LD6.2@1232,1105
NetLD7_2: LD7.2 R46.2 | length 114.2
  Top w5.91: R46.2@1104,1218 1104,1108 LD7.2@1107,1105
NetQ1_2: Q1.2 U5.19 | length 375.8
  Top w10: U5.19@1498.57,4432.28 1498.57,4476.57 1519.24,4497.24 1696.41,4497.24 1737.15,4537.99 Q1.2@1737.15,4605.51
NetQ1_4: Q1.4 U5.17 | length 408.8
  Top w5.91: v1(1436.56,4379.13) 1447.39,4389.96 U5.17@1447.39,4432.28
  Top w10: Q1.4@1637.15,4605.51 1637.35,4605.31 v1(1637.35,4536.61)
  Bottom w10: v1(1436.56,4379.13) 1436.56,4406.69 1566.48,4536.61 v1(1637.35,4536.61)
NetQ2_1: Q2.1 Q3.1 R17.2 U7.6 | length 740.8
  Top w10: Q3.1@1893.26,3798.35 Q2.1@1893.26,3991.24 v1(1893.26,4138.98) R17.2@1893.26,4169.59 ; U7.6@2180.66,4162.6 v1(2180.66,4213.78)
  Signal 3 w10: v1(1893.26,4138.98) 1968.06,4213.78 v1(2180.66,4213.78)
NetQ3_3: Q3.3 R19.1 | length 130.4
  Top w10: R19.1@2050.74,3871.26 Q3.3@1930.78,3871.26 ; Q3.3@1930.78,3871.26 Q3.3@1930.76,3873.33 ; Q3.3@1930.78,3871.26 Q3.3@1930.76,3873.33 ; Q3.3@1930.78,3871.26 Q3.3@1930.76,3873.33 ; Q3.3@1930.78,3871.26 Q3.3@1930.76,3873.33 ; Q3.3@1930.78,3871.26 Q3.3@1930.76,3873.33
NetQ4_3: Q4.3 R23.1 | length 660.9
  Top w5.91: Q4.3@2369.63,3601.65 Q4.3@2371.5,3601.67 ; Q4.3@2369.63,3601.67 R23.1@2369.63,3733.46 ; Q4.3@2369.63,3601.67 R23.1@2369.63,3733.46 ; Q4.3@2369.63,3601.67 R23.1@2369.63,3733.46 ; Q4.3@2369.63,3601.67 R23.1@2369.63,3733.46 ; Q4.3@2369.63,3601.67 R23.1@2369.63,3733.46
NetQ5_3: Q5.3 R38.1 | length 103.8
  Top w5.91: R38.1@2983.81,1056.3 Q5.3@2983.81,1146.85 ; Q5.3@2983.81,1146.85 Q5.3@2985.68,1148.72 ; Q5.3@2983.81,1146.85 Q5.3@2985.68,1148.72 ; Q5.3@2983.81,1146.85 Q5.3@2985.68,1148.72 ; Q5.3@2983.81,1146.85 Q5.3@2985.68,1148.72 ; Q5.3@2983.81,1146.85 Q5.3@2985.68,1148.72
NETQ6_3: Q6.3 R39.1 | length 149.5
  Top w5.91: R39.1@3058.61,1056.3 3058.61,1115.35 3091.96,1148.7 Q6.3@3135.28,1148.72
NetQ7_3: Q7.3 R42.1 | length 102.8
  Top w5.91: R42.1@3286.96,1056.3 Q7.3@3286.96,1148.7 ; Q7.3@3284.89,1148.72 Q7.3@3286.96,1148.7 ; Q7.3@3284.89,1148.72 Q7.3@3286.96,1148.7 ; Q7.3@3284.89,1148.72 Q7.3@3286.96,1148.7 ; Q7.3@3284.89,1148.72 Q7.3@3286.96,1148.7 ; Q7.3@3284.89,1148.72 Q7.3@3286.96,1148.7
NetQ9_3: Q9.3 R174.1 | length 99.8
  Bottom w5.91: R174.1@3263.34,4103.54 v1(3227.9,4103.54) Q9.3@3176.72,4103.54 ; Q9.3@3174.85,4101.67 Q9.3@3176.72,4103.54 ; Q9.3@3174.85,4101.67 Q9.3@3176.72,4103.54 ; Q9.3@3174.85,4101.67 Q9.3@3176.72,4103.54 ; Q9.3@3174.85,4101.67 Q9.3@3176.72,4103.54 ; Q9.3@3174.85,4101.67 Q9.3@3176.72,4103.54
NetQ10_3: Q10.3 R175.1 | length 89.2
  Bottom w5.91: Q10.3@3174.85,3952.07 3176.72,3953.94 v1(3227.9,3953.94) R175.1@3263.34,3953.94
NetQ11_3: Q11.3 R176.1 | length 99.8
  Bottom w5.91: R176.1@3263.34,3804.33 v1(3227.9,3804.33) Q11.3@3176.72,3804.33 ; Q11.3@3174.85,3802.46 Q11.3@3176.72,3804.33 ; Q11.3@3174.85,3802.46 Q11.3@3176.72,3804.33 ; Q11.3@3174.85,3802.46 Q11.3@3176.72,3804.33 ; Q11.3@3174.85,3802.46 Q11.3@3176.72,3804.33 ; Q11.3@3174.85,3802.46 Q11.3@3176.72,3804.33
NetR6_1: R6.1 U5.15 | length 101.4
  Top w5.91: R6.1@1395.22,4335.83 U5.15@1395.22,4431.3 ; U5.15@1396.21,4432.28 U5.15@1396.21,4431.3 ; U5.15@1395.22,4431.3 U5.15@1396.21,4431.3 ; U5.15@1395.22,4431.3 U5.15@1396.21,4431.3 ; U5.15@1395.22,4431.3 U5.15@1396.21,4431.3 ; U5.15@1395.22,4431.3 U5.15@1396.21,4431.3 ; U5.15@1395.22,4431.3 U5.15@1396.21,4431.3
NetR10_1: R10.1 W2.2 | length 211.4
  Top w7: W2.2@947.74,2790.97 947.74,2669.12 970.89,2645.97 R10.1@1027.74,2645.97
NetR12_1: R12.1 U2.3 | length 117.4
  Top w6.02: R12.1@3880.4,3157.23 3906.82,3157.23 3921.52,3171.94 U2.3@3991.71,3171.94
NetR13_1: R13.1 U2.5 | length 114.2
  Top w6.02: U2.5@4263.37,3121.94 4263.37,3105.56 4310.4,3058.53 R13.1@4310.4,3027.23
NetR14_1: R14.1 U6.53 | length 224.3
  Top w5.91: U6.53@1710.31,2930.95 1710.31,2855.31 v1(1710.69,2855.31)
  Bottom w5.91: v1(1710.69,2855.31) 1710.69,3001.69 R14.1@1712,3003
NetR20_2: R20.2 R25.1 U7.3 | length 189
  Top w10: R20.2@2117.67,3872.14 R25.1@2180.66,3871.26 U7.3@2180.66,3997.24
NetR22_1: R22.1 U7.7 U9.1 | length 197.8
  Top w10: U7.7@2155.07,4162.6 R22.1@2155.07,4268.9 U9.1@2155.07,4360.43
NetR27_2: R27.2 U11.AF25 | length 529.9
  Top w5.91: v1(2065,2707) 2113,2659 2361,2659 2425,2723 2454.9,2723 2475.93,2701.97 U11.AF25@2495.62,2682.28
  Bottom w5.91: v1(2065,2707) R27.2@2065,2743
NetR29_1: R29.1 S1.2 S1.2_1 U10.3 | length 750.3
  Top w10: S1.2_1@2408.61,4170.94 2407.04,4170.94 R29.1@2407.04,4268.9 R29.1@2406.33,4268.9 ; R29.1@2406.33,4268.9 U10.3@2406.33,4355.51 ; R29.1@2406.33,4268.9 U10.3@2406.33,4355.51 ; R29.1@2406.33,4268.9 U10.3@2406.33,4355.51 ; R29.1@2406.33,4268.9 U10.3@2406.33,4355.51 ; R29.1@2406.33,4268.9 U10.3@2406.33,4355.51
  Top w20: S1.2@2408.61,3953.94 S1.2_1@2408.61,4170.94
NetR32_2: R32.2 U11.AE24 | length 738.1
  Top w5.91: v1(2515.3,2662.6) U11.AE24@2534.99,2642.91 ; v1(2535.39,3301.42) 2538.93,3304.95 R32.2@2538.93,3346.76
  Signal 10 w5.91: v1(2515.3,2662.6) 2495.62,2682.28 2495.62,3261.64 v1(2535.39,3301.42)
NetR35_2: R35.2 Y1.3 | length 147.1
  Top w5.91: Y1.3@2817.67,1363.39 2837.35,1343.7 2955.38,1343.7 R35.2@2956.25,1342.82
NetR75_2: R75.2 U13.16 | length 145.7
  Top w10: U13.16@790,1131 895,1131 904,1140 R75.2@904,1168
NetR98_2: R98.2 U13.14 | length 123.2
  Top w10: U13.14@790,1031 875,1031 R98.2@902,1004
NetR101_1: R101.1 U13.5 | length 168.8
  Top w10: R101.1@428,981 428,945 442,931 U13.5@555,931
NetR116_1: R116.1 U13.7 | length 131.2
  Top w10: R116.1@430,816 476,816 491,831 U13.7@555,831
NetR129_1: R129.1 W1.2 | length 119.4
  Top w5.91: W1.2@5034.71,2027.6 5034.99,2027.87 R129.1@5034.99,2146.85
NetR150_1: R150.1 U12.3 | length 108.8
  Top w5.91: v1(2960.19,3505.12) 3031.64,3505.12 U12.3@3033.02,3506.5
  Bottom w5.91: R150.1@2924.75,3505.12 v1(2960.19,3505.12)
NetR154_1: R154.1 U12.5 | length 113.1
  Top w5.91: U12.5@2761.37,3556.5 2822.59,3556.5 v1(2834.2,3568.11)
  Bottom w5.91: v1(2834.2,3568.11) R154.1@2869.63,3568.11
NetR164_2: R164.2 U11.W3 | length 1090.7
  Top w5.91: U11.W3@3361.76,2406.69 v1(3381.45,2426.38)
  Signal 4 w4.02: v1(3381.45,2426.38) 3381.45,2454.55 3323,2513 3323,3206 v1(3402,3285)
  Bottom w4.02: v1@3401.8,3285.2 3401.8,3360.08 R164.2@3401.8,3432.19
  Bottom w5.91: v1@3401.8,3285.2 v1(3402,3285)
NetR170_2: R170.2 R177.1 U11.V20 | length 1352.4
  Top w5.91: U11.V20@2692.47,2367.32 v1(2712.16,2387.01)
  Signal 6 w5.91: v1(2712.16,2387.01) 2731.84,2367.32 2731.84,2327.16 2771,2288 2771,2262.19 2785,2248.19 2798.62,2248.19 2810,2236.81 2810,2054 2890,1974 2890,1623 2956.67,1556.33 v1(3035.68,1556.33)
  Bottom w5.91: v1(3035.68,1556.33) 3035.68,1569.01 3060.06,1593.4 3159.33,1593.4 3208.22,1544.51 R170.2@3208.22,1517.81 3270.33,1517.81 R177.1@3271.21,1516.93
NetR180_2: R180.2 U26.4 | length 209.8
  Bottom w5.91: U26.4@3336.56,1283.39 3348.69,1283.39 3381.45,1316.14 3381.45,1414.57 3397.19,1430.31 R180.2@3397.19,1460.93
OPEN_OUT: J6.3 U11.AD22 | length 2928.2
  Top w5.91: v1(2594.04,2623.23) U11.AD22@2613.73,2603.54
  Signal 6 w5.91: J6.3@223.1,3808.34 351.66,3808.34 812,3348 1935.03,3348 2574,2709.03 2574,2643.27 v1(2594.04,2623.23)
PARALLEL_FLASH_A0: U6.32 U11.AC23 | length 829.1
  Top w5.91: v1(2121,2877) 2123.69,2879.69 U6.32@2123.69,2930.95 ; v1(2554.67,2583.86) U11.AC23@2574.36,2564.17
  Signal 3 w5.91: v1(2121,2877) 2174,2930 2432,2930 2574.36,2787.64 2574.36,2603.54 v1(2554.67,2583.86)
PARALLEL_FLASH_A1: U6.28 U11.AC24 | length 728
  Top w5.91: v1@2182.75,2126.25 U6.28@2182.75,2175.05 ; v1(2515.3,2583.86) U11.AC24@2534.99,2564.17
  Signal 10 w5.91: v1(2183,2126) 2183.66,2126.66 2183.66,2347.66 2400,2564 2495.44,2564 v1(2515.3,2583.86)
PARALLEL_FLASH_A2: U6.27 U11.R21 | length 624.4
  Top w5.91: U6.27@2163.06,2175.05 2165,2176.98 v1(2165,2231) ; U11.R21@2653.1,2249.21 v1(2672.79,2268.9)
  Signal 6 w5.91: v1(2165,2231) 2203.66,2269.66 2402.48,2269.66 2421.41,2288.58 2653.1,2288.58 v1(2672.79,2268.9)
PARALLEL_FLASH_A3: U6.26 U11.R22 | length 656.3
  Top w5.91: v1(2143,2106) 2143,2174.67 U6.26@2143.38,2175.05 ; U11.R22@2613.73,2249.21 v1(2633.41,2229.53)
  Signal 9 w5.91: v1(2143,2106) 2143,2105 2237,2105 2381.21,2249.21 2421.41,2249.21 2613.73,2249.21 v1(2633.41,2229.53)
PARALLEL_FLASH_A4: U6.25 U11.T23 | length 690.2
  Top w5.91: v1(2123,2125) 2123,2174.35 U6.25@2123.69,2175.05 ; U11.T23@2574.36,2288.58 v1(2594.04,2268.9)
  Signal 4 w5.91: v1(2123,2125) 2125,2127 2125,2238 2175.58,2288.58 2421.41,2288.58 2574.36,2288.58 v1(2594.04,2268.9)
PARALLEL_FLASH_A5: U6.24 U11.T24 | length 768.1
  Top w5.91: U6.24@2104.01,2175.05 2104.01,2233.01 v1(2106,2235) ; v1(2515.3,2308.27) U11.T24@2534.99,2288.58
  Signal 3 w5.91: v1(2106,2235) 2085.34,2214.34 2018.27,2214.34 2007.34,2225.27 2007.34,2240.73 2094.56,2327.95 2421.41,2327.95 2495.62,2327.95 v1(2515.3,2308.27)
PARALLEL_FLASH_A6: U6.23 U11.R18 | length 851.6
  Top w5.91: v1(2083,2121) 2083,2173.72 U6.23@2084.32,2175.05 ; U11.R18@2771.21,2249.21 v1(2790.9,2268.9)
  Signal 3 w5.91: v1(2083,2121) 2086,2121 2214.21,2249.21 2771.21,2249.21 v1(2790.9,2268.9)
PARALLEL_FLASH_A7: U6.22 U11.R17 | length 884.2
  Top w5.91: U6.22@2064.64,2175.05 2065,2175.41 v1(2065,2236) ; U11.R17@2810.58,2249.21 v1(2830.27,2268.9)
  Signal 9 w5.91: v1(2065,2236) 2065,2237 2116,2288 2414,2288 2811.16,2288 v1(2830.27,2268.9)
PARALLEL_FLASH_A8: U6.20 U11.R25 | length 606.6
  Top w5.91: U6.20@2025.27,2175.05 2026,2175.78 v1(2026,2233) ; U11.R25@2495.62,2249.21 v1(2515.3,2268.9)
  Signal 3 w5.91: v1(2026,2233) 2081.58,2288.58 2421.41,2288.58 2495.62,2288.58 v1(2515.3,2268.9)
PARALLEL_FLASH_A9: U6.19 U11.R26 | length 539
  Top w5.91: U6.19@2005.58,2175.05 2005.58,2245.58 2028.9,2268.9 2436.56,2268.9 U11.R26@2456.25,2249.21
PARALLEL_FLASH_A10: U6.18 U11.M26 | length 594.3
  Top w5.91: U6.18@1985.9,2175.05 1985.9,2124.1 v1(1997,2113) ; v1(2436.56,2150.79) U11.M26@2456.25,2131.1
  Signal 9 w5.91: v1@1994,2117 2025,2086 2250,2086 2336,2172 2393,2172 2414.21,2150.79 v1(2436.56,2150.79)
PARALLEL_FLASH_A11: U6.17 U11.M25 | length 684
  Top w5.91: v1(1966,2123) 1966,2174.83 U6.17@1966.21,2175.05 ; v1(2475.93,2150.79) U11.M25@2495.62,2131.1
  Signal 9 w5.91: v1(1966,2123) 1966,2088 1984,2070 2261,2070 2344,2153 2383,2153 2404.9,2131.1 2456.25,2131.1 v1(2475.93,2150.79)
PARALLEL_FLASH_A12: U6.13 U11.L24 | length 779.9
  Top w5.91: v1(1887,2121) 1887,2174.57 U6.13@1887.47,2175.05 ; v1(2515.3,2072.04) U11.L24@2534.99,2091.73
  Signal 9 w5.91: v1(1887,2121) 1887,2078 1922,2043 2405,2043 2414,2052 2495.26,2052 v1(2515.3,2072.04)
PARALLEL_FLASH_A13: U6.12 U11.M23 | length 847.3
  Top w5.91: U6.12@1867.79,2175.05 1868.25,2174.58 1868.25,2129.48 1867.75,2128.97 1867.75,2113.03 1868.25,2112.52 1868.25,2086.75 1909.19,2045.81 2202.81,2045.81 2220,2063 v1(2323,2063) ; v1(2554.67,2111.42) U11.M23@2574.36,2131.1
  Signal 3 w5.91: v1(2323,2063) 2382,2063 2410.73,2091.73 2534.99,2091.73 v1(2554.67,2111.42)
PARALLEL_FLASH_A14: U6.11 U11.N18 | length 1152.9
  Top w5.91: U6.11@1848.1,2175.05 1848.1,2100.9 v1(1849,2100) ; U11.N18@2771.21,2170.47 v1(2790.9,2150.79)
  Signal 3 w5.91: v1(1849,2100) 1849,2071 1866,2054 2189,2054 2324,2189 v1(2422,2189)
  Signal 9 w5.91: v1(2422,2189) 2439,2189 2457,2171 2770.68,2171 v1(2790.9,2150.79)
PARALLEL_FLASH_A15: U6.10 U11.N17 | length 1210.7
  Top w5.91: v1(1827,2126) 1827,2173.63 U6.10@1828.42,2175.05 ; U11.N17@2810.58,2170.47 v1(2830.27,2150.79)
  Signal 3 w5.91: v1(1827,2126) 1827,2071 1858,2040 2195,2040 2325.34,2170.34 2810.71,2170.34 v1(2830.27,2150.79)
PARALLEL_FLASH_A16: U6.8 U11.N20 | length 1143.7
  Top w5.91: v1(1788,2100) 1789.05,2101.05 U6.8@1789.05,2175.05 ; U11.N20@2692.47,2170.47 v1(2712.16,2150.79)
  Signal 3 w5.91: v1(1788,2100) 1788,2052 1821,2019 2202,2019 2274,2091 2369,2091 2409.1,2131.1 2692.47,2131.1 v1(2712.16,2150.79)
PARALLEL_FLASH_A17: U6.7 U11.M20 | length 1094.7
  Top w5.91: v1(1769,2124) 1769,2174.68 U6.7@1769.36,2175.05 ; v1(2672.78,2150.79) U11.M20@2692.47,2131.1
  Signal 9 w5.91: v1(1769,2124) 1794,2149 1895,2149 1906.34,2137.66 1906.34,2095.66 1945,2057 2284,2057 v1(2358,2131)
  Signal 6 w5.91: v1(2358,2131) 2358.1,2131.1 2653.1,2131.1 v1(2672.78,2150.79)
PARALLEL_FLASH_A18: U6.6 U11.J26 | length 849.5
  Top w5.91: U6.6@1749.68,2175.05 1749.68,2047.32 1764.22,2032.78 2309.48,2032.78 2310.7,2034 2388,2034 2409.01,2012.99 U11.J26@2456.25,2012.99
PARALLEL_FLASH_A19: U6.5 U11.J25 | length 932.5
  Top w5.91: v1(1730,2124) U6.5@1730,2175.04 ; v1(2475.93,1993.3) U11.J25@2495.62,2012.99
  Signal 3 w5.91: v1(1730,2124) 1730,2033 1770,1993 2475.63,1993 v1(2475.93,1993.3)
PARALLEL_FLASH_A20: U6.4 U11.J21 | length 1107.9
  Top w5.91: U6.4@1710.31,2175.05 1710.31,2035.69 1732,2014 v1(2358,2014) ; v1(2633.41,2032.68) U11.J21@2653.1,2012.99
  Signal 6 w5.91: v1(2358,2014) 2359.01,2012.99 2613.73,2012.99 v1(2633.41,2032.68)
PARALLEL_FLASH_A21: U6.3 U11.H21 | length 1146.3
  Top w5.91: U6.3@1690.62,2175.05 1690.62,2032.38 1750,1973 v1(2360,1973) ; v1(2633.41,1993.31) U11.H21@2653.1,1973.62
  Signal 6 w5.91: v1(2360,1973) 2360.62,1973.62 2613.73,1973.62 v1(2633.41,1993.31)
PARALLEL_FLASH_A22: U6.1 U11.C26 | length 1055.1
  Top w5.91: U6.1@1651.25,2175.05 1651.25,2029.75 1904,1777 2456.02,1777 U11.C26@2456.25,1776.77
PARALLEL_FLASH_A23: U6.30 U11.C25 | length 1402.8
  Top w5.91: v1(2163,2869) 2163,2930.89 U6.30@2163.06,2930.95 ; v1(2475.93,1757.08) U11.C25@2495.62,1776.77
  Bottom w5.91: v1(2163,2869) 2247,2869 2282,2834 2282,1913 2419.25,1775.75 2457.27,1775.75 v1(2475.93,1757.08)
PARALLEL_FLASH_B\Y\T\E\: R21.1 R26.2 U6.31 U11.AE25 | length 601.1
  Top w5.91: U6.31@2143.38,2930.95 2143.38,2842.62 v1@2187,2799 ; v1(2475.93,2662.6) U11.AE25@2495.62,2642.91
  Signal 6 w5.91: v1(2188,2799) 2192,2799 2288,2703 2400.69,2703 2421.41,2682.28 2456.25,2682.28 v1(2475.93,2662.6)
  Bottom w5.91: R21.1@2147,2800 2148,2799 v1(2188,2799) 2224,2799 R26.2@2225,2800
PARALLEL_FLASH_C\E\: U6.14 U11.P26 | length 758.1
  Top w5.91: U6.14@1907.16,2175.05 1905.75,2173.64 1905.75,2129.48 1906.25,2128.97 1906.25,2079.75 1928.38,2057.62 2181.62,2057.62 2231,2107 2373,2107 2397,2131 2397,2199 2407.75,2209.75 2456.15,2209.75 U11.P26@2456.25,2209.84
PARALLEL_FLASH_D0: R27.1 R30.1 U6.33 | length 278.5
  Top w5.91: v1(2028,2798) 2087,2798 2104.25,2815.25 2104.25,2866.52 2101.75,2869.03 2101.75,2884.97 2104.25,2887.48 2104.25,2930.71 U6.33@2104.01,2930.95
  Bottom w5.91: R30.1@1991,2798 1992,2799 2029,2799 v1(2028,2798) 2064,2798 R27.1@2065,2799
PARALLEL_FLASH_D1: U6.35 U11.AE18 | length 1030.5
  Top w5.91: v1(2064,2871) 2064,2930.32 U6.35@2064.64,2930.95 ; v1(2751.52,2662.6) U11.AE18@2771.21,2642.91
  Signal 3 w5.91: v1(2064,2871) 2064,2952 2072,2960 2444,2960 2605,2799 2696,2799 2731.84,2763.16 2731.84,2682.28 v1(2751.52,2662.6)
PARALLEL_FLASH_D2: U6.38 U11.AF18 | length 978.8
  Top w5.91: v1(2005,2874) 2005,2930.37 U6.38@2005.58,2930.95 ; v1(2751.52,2701.97) U11.AF18@2771.21,2682.28
  Signal 9 w5.91: v1(2005,2874) 2005,2781 2027,2759 2434,2759 2460,2785 2668.49,2785 v1(2751.52,2701.97)
PARALLEL_FLASH_D3: U6.40 U11.Y15 | length 1491.7
  Top w5.91: v1(1966,2880) 1966,2930.74 U6.40@1966.21,2930.95 ; v1(2869.63,2465.75) U11.Y15@2889.32,2446.06
  Signal 3 w5.91: v1(1966,2880) 1966,2955 1985,2974 2447,2974 2608,2813 2863,2813 2889.32,2786.68 2889.32,2485.43 v1(2869.63,2465.75)
PARALLEL_FLASH_D4: U6.44 U11.AE12 | length 1493.9
  Top w5.91: U6.44@1887.47,2930.95 1888,2931.48 v1(1888,2990) ; U11.AE12@3007.43,2642.91 v1(3027.12,2662.6)
  Signal 3 w5.91: v1(1888,2990) 1905.19,3007.19 2494.81,3007.19 2630,2872 2991,2872 3046.8,2816.2 3046.8,2682.28 v1(3027.12,2662.6)
PARALLEL_FLASH_D5: U6.46 U11.AF12 | length 1494.3
  Top w5.91: v1(1848,2870) 1848,2930.85 U6.46@1848.1,2930.95 ; U11.AF12@3007.43,2682.28 v1(3027.12,2701.97)
  Signal 3 w5.91: v1(1848,2870) 1968,2990 2455,2990 2616.02,2828.98 2773.32,2828.98 ; 2773.34,2829 2998,2829 3027.12,2799.88 v1(3027.12,2701.97)
PARALLEL_FLASH_D6: U6.49 U11.AF10 | length 1608.1
  Top w5.91: v1(1789,2982) U6.49@1789.05,2930.95 U6.49@1789.05,2930.95 ; U11.AF10@3086.17,2682.28 v1(3105.86,2701.97)
  Signal 3 w5.91: v1(1789,2982) 1789,3006 1802,3019 2505,3019 2637,2887 3009,2887 3105.86,2790.14 v1(3105.86,2701.97)
PARALLEL_FLASH_D7: U6.51 U11.AE10 | length 1874.5
  Top w5.91: U6.51@1749.68,2930.95 1749.68,2854.32 v1(1750,2854) ; U11.AE10@3086.17,2642.91 v1(3105.86,2662.6)
  Signal 3 w5.91: v1(1750,2854) 1750,2992 1792,3034 2512,3034 2643,2903 3016,2903 3125.54,2793.46 3125.54,2682.28 v1(3105.86,2662.6)
PARALLEL_FLASH_D8: U6.34 U11.AD20 | length 990.3
  Top w5.91: U6.34@2084.32,2930.95 2085,2930.28 v1(2085,2849) ; v1(2672.78,2623.23) U11.AD20@2692.47,2603.54
  Signal 3 w5.91: v1(2085,2849) 2085,2933 2099,2947 2439,2947 2598.81,2787.19 2625.81,2787.19 2653.1,2759.9 2653.1,2642.91 v1(2672.78,2623.23)
PARALLEL_FLASH_D9: U6.36 U11.AF19 | length 979.7
  Top w5.91: U6.36@2044.95,2930.95 2044.75,2930.75 2044.75,2843.75 2004.77,2803.77 2004.77,2794 2024.77,2774 2270,2774 2323,2827 2602.28,2827 2712.15,2717.12 2712.15,2701.97 U11.AF19@2731.84,2682.28
PARALLEL_FLASH_D10: U6.39 U11.AF20 | length 908
  Top w5.91: U6.39@1985.9,2930.95 1985.75,2930.8 1985.75,2851.25 v1(1986,2851) ; v1(2672.78,2701.97) U11.AF20@2692.47,2682.28
  Signal 9 w5.91: v1(1986,2851) 1988,2849 1988,2761 2009,2740 2634.75,2740 v1(2672.78,2701.97)
PARALLEL_FLASH_D11: U6.41 U11.AF23 | length 827.8
  Top w5.91: v1(1946,2849) 1946,2930.43 U6.41@1946.53,2930.95 ; v1(2554.67,2701.97) U11.AF23@2574.36,2682.28
  Signal 3 w5.91: v1(1946,2849) 1970,2825 2514,2825 2554.67,2784.33 v1(2554.67,2701.97)
PARALLEL_FLASH_D12: U6.45 U11.AA23 | length 1258.4
  Top w5.91: U6.45@1867.79,2930.95 1867.79,2785.21 1913,2740 2381,2740 2456,2815 2564,2815 v1(2614,2765) ; U11.AA23@2574.36,2485.43 v1(2594.04,2505.12)
  Signal 4 w5.91: v1(2594.04,2505.12) 2613.73,2524.8 2613.73,2764.73 v1(2614,2765)
PARALLEL_FLASH_D13: U6.47 U11.AE26 | length 883.4
  Top w5.91: U6.47@1828.42,2930.95 1828.42,2699.58 1886,2642 2455.33,2642 U11.AE26@2456.25,2642.91
PARALLEL_FLASH_D14: U6.50 U11.AD26 | length 985
  Top w5.91: U6.50@1769.36,2930.95 1769.36,2653.64 1799.77,2623.23 2421.41,2623.23 2436.56,2623.23 U11.AD26@2456.25,2603.54
PARALLEL_FLASH_D15: U6.52 U11.AC26 | length 1059.7
  Top w5.91: U6.52@1729.99,2930.95 1729.99,2621.01 1767.14,2583.86 2421.41,2583.86 2436.56,2583.86 U11.AC26@2456.25,2564.17
PARALLEL_FLASH_O\E\: U6.54 U11.AC25 | length 1116.5
  Top w5.91: v1(1690,2876) 1690,2930.33 U6.54@1690.62,2930.95 ; v1(2475.93,2583.86) U11.AC25@2495.62,2564.17
  Signal 3 w5.91: v1(1690,2876) 1690,2660 1746.46,2603.54 2421.41,2603.54 2456.25,2603.54 v1(2475.93,2583.86)